# Altium PCB Breakout_Boards_Panel.PcbDoc
Units mm, origin at the board's own origin, x right, y up, seen from the top; angles counter-clockwise.
Board outline 241.45 x 205.99 mm, 4 copper layers (Top, Ground Plane, Power Plane, Bottom), stack 1.562 mm thick; 32 components, 0 nets, 0 pads, 0 vias.
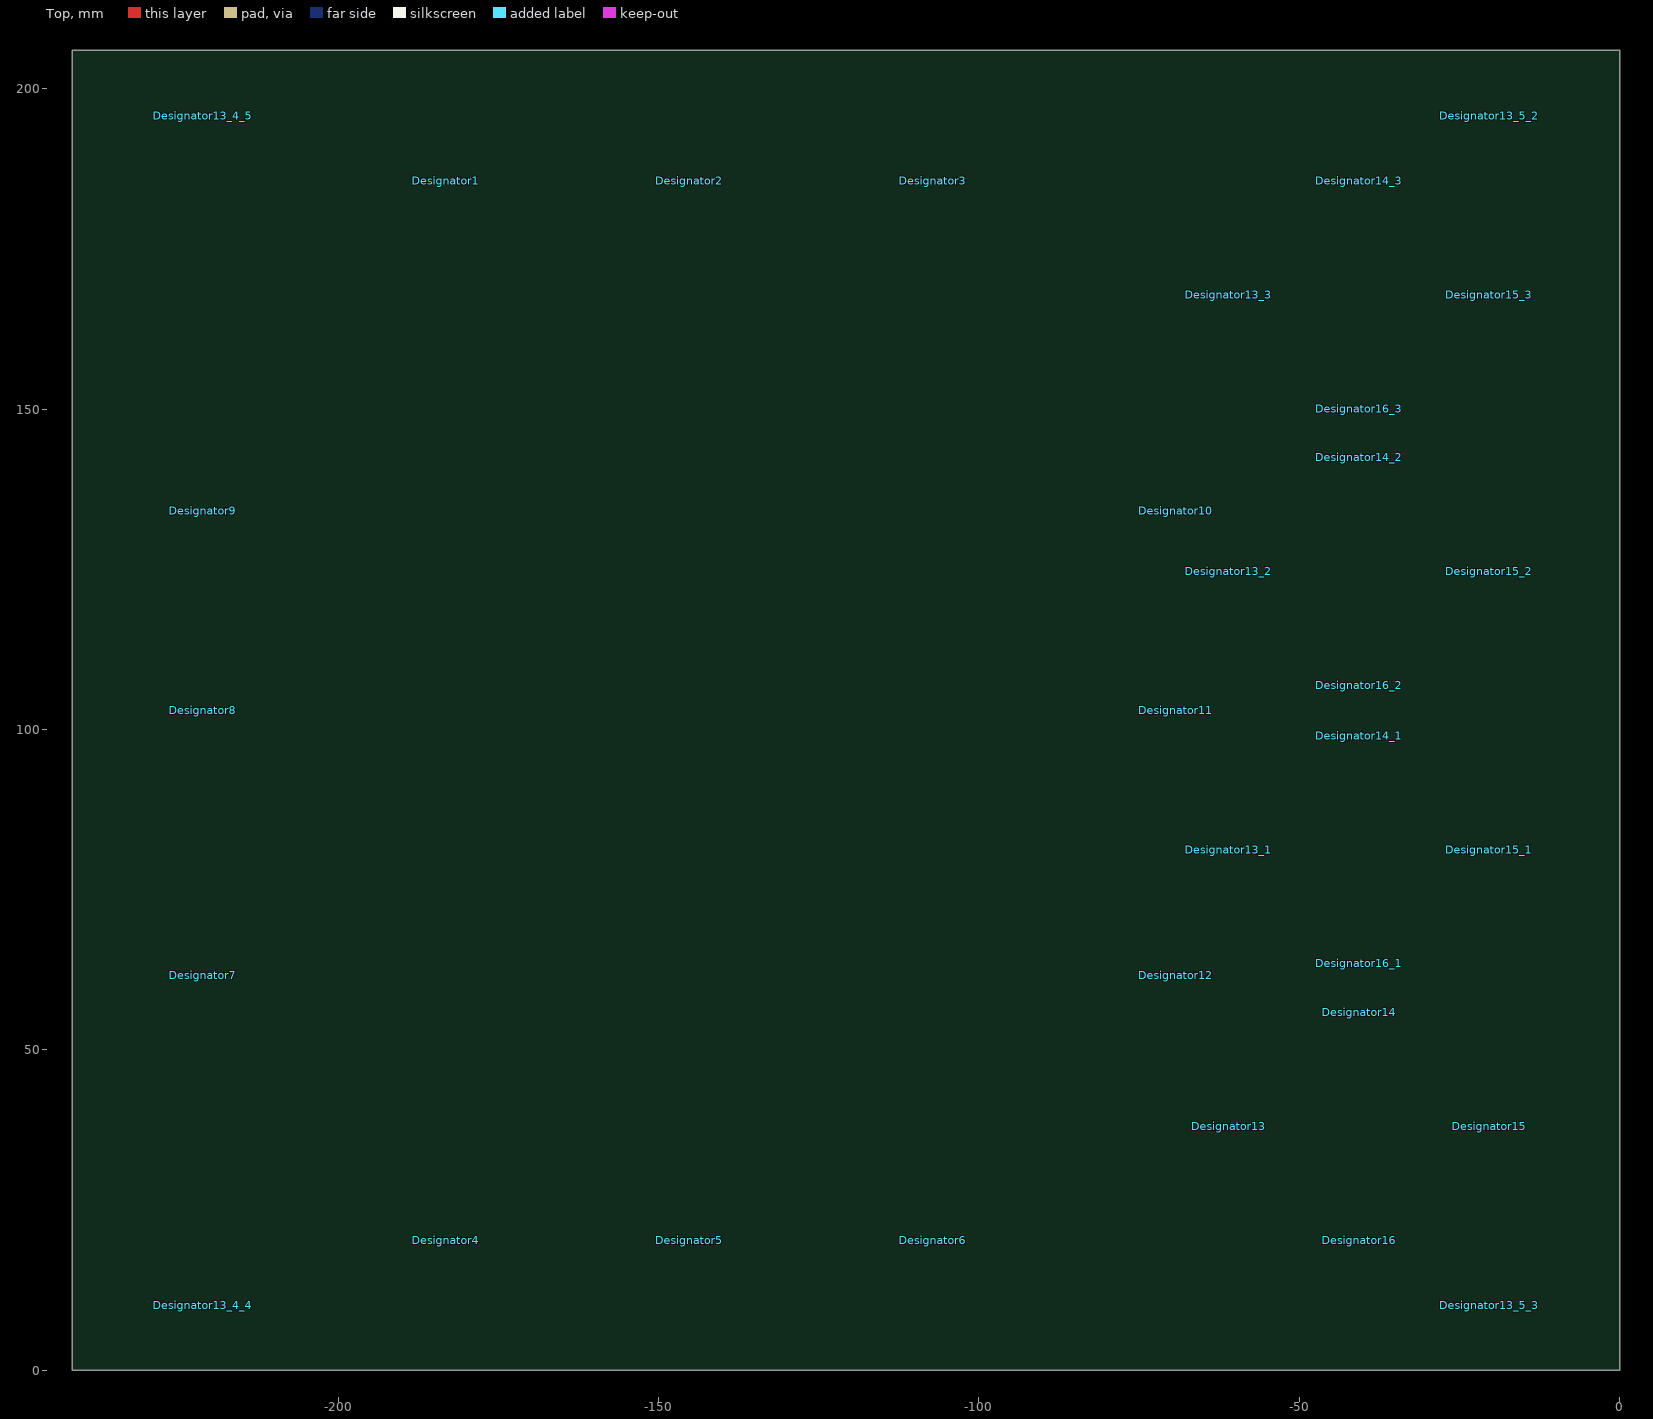
[diagram p0: Top view]
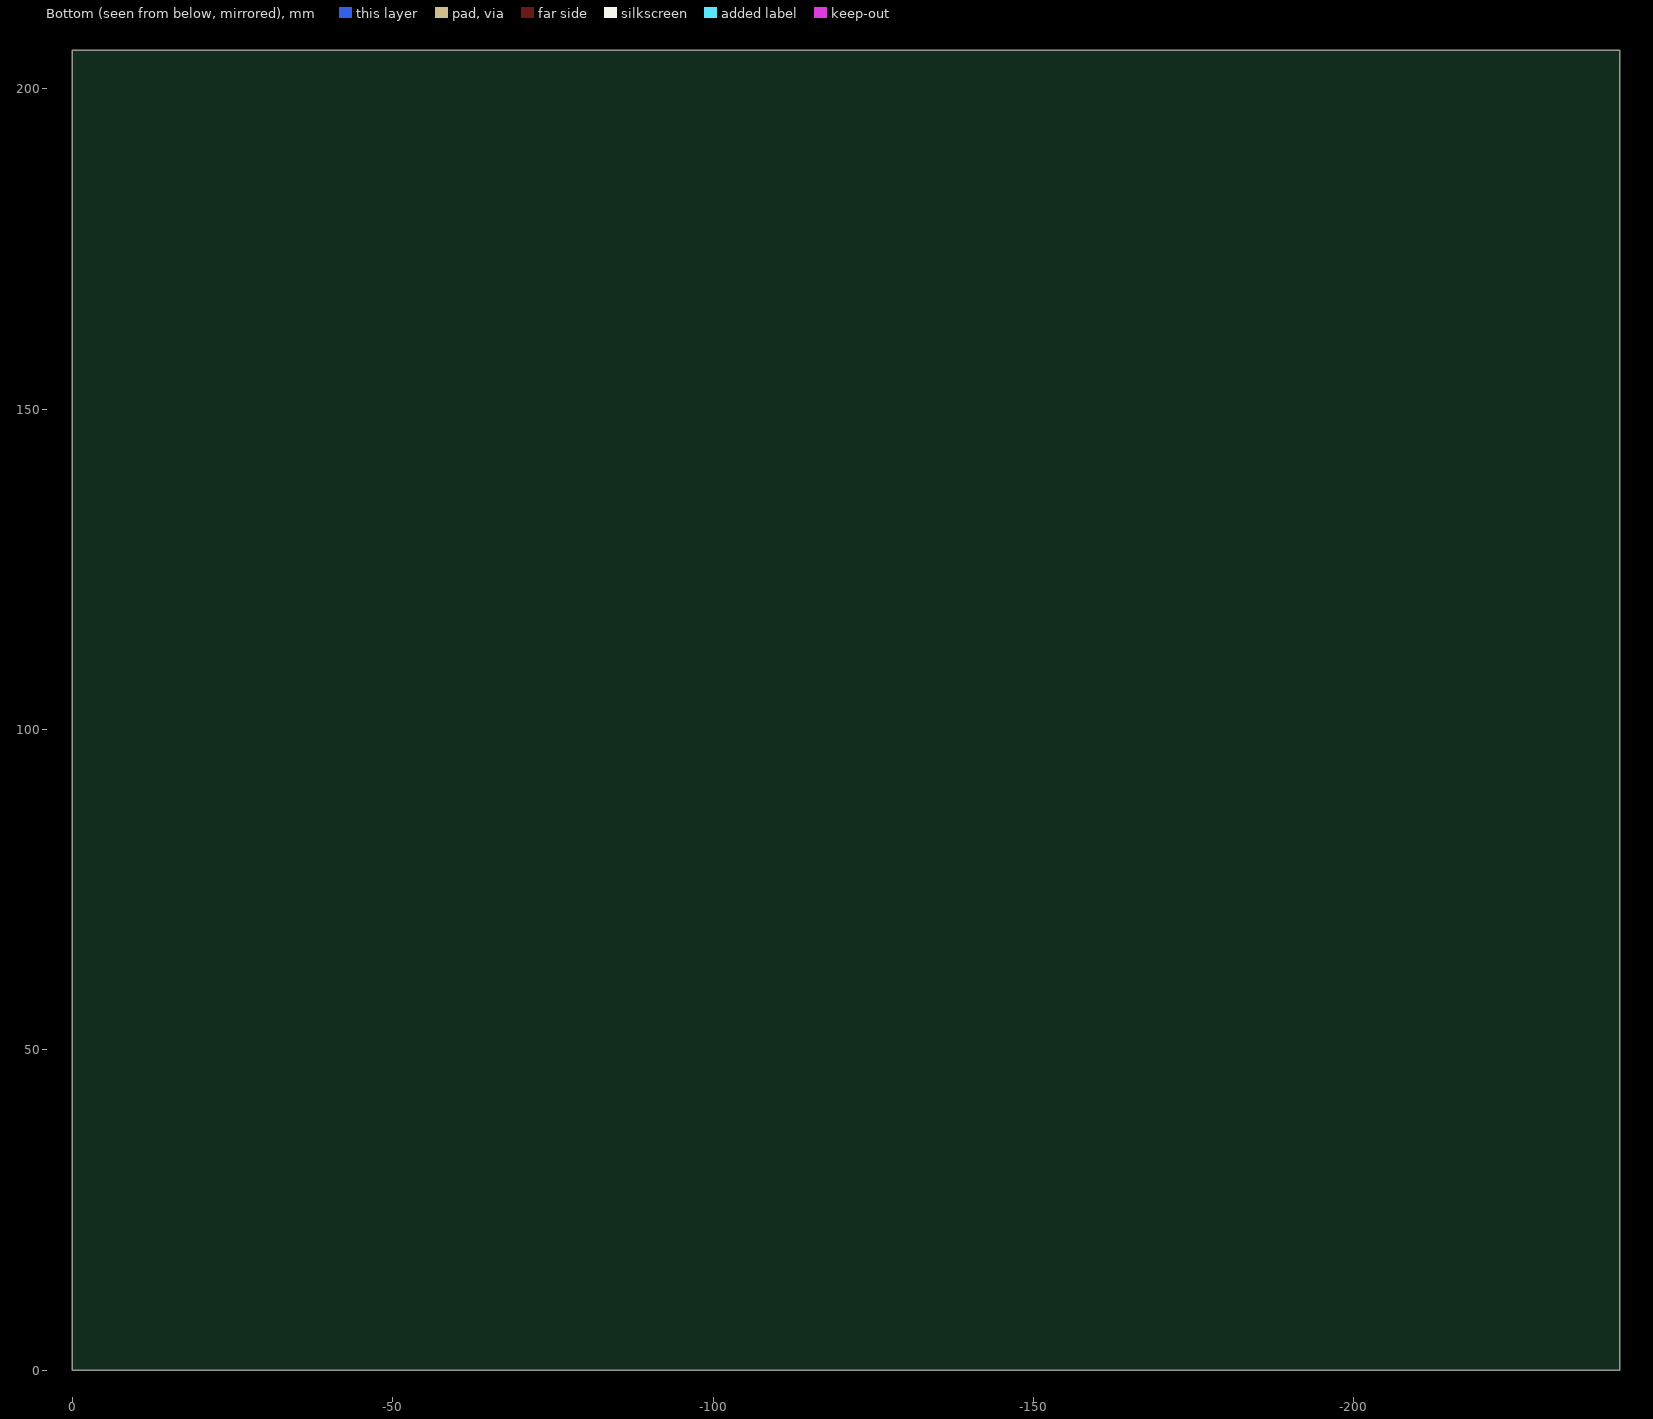
[diagram p1: Bottom view, seen from below]
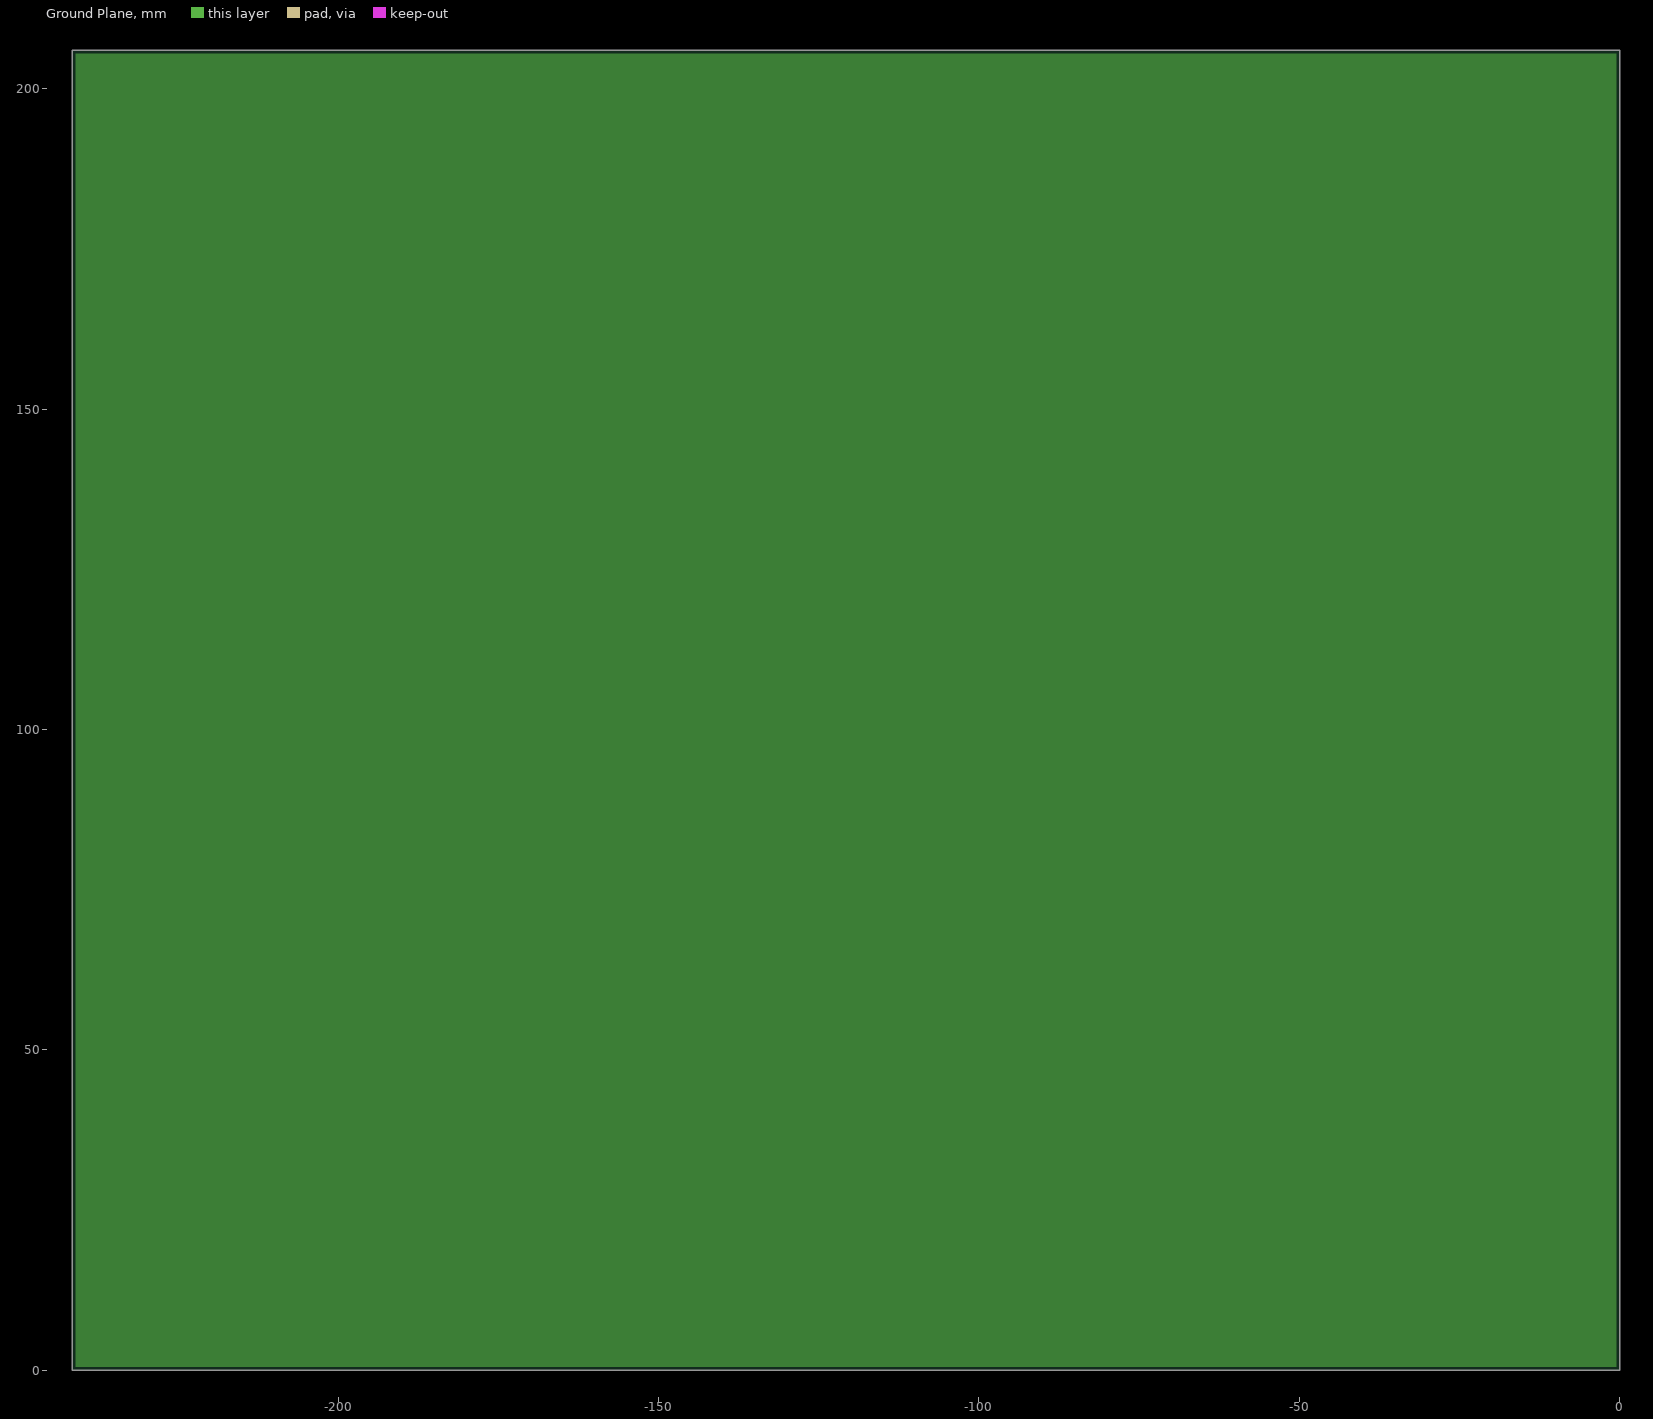
[diagram p2: Ground Plane, clearances drawn from the general rule]
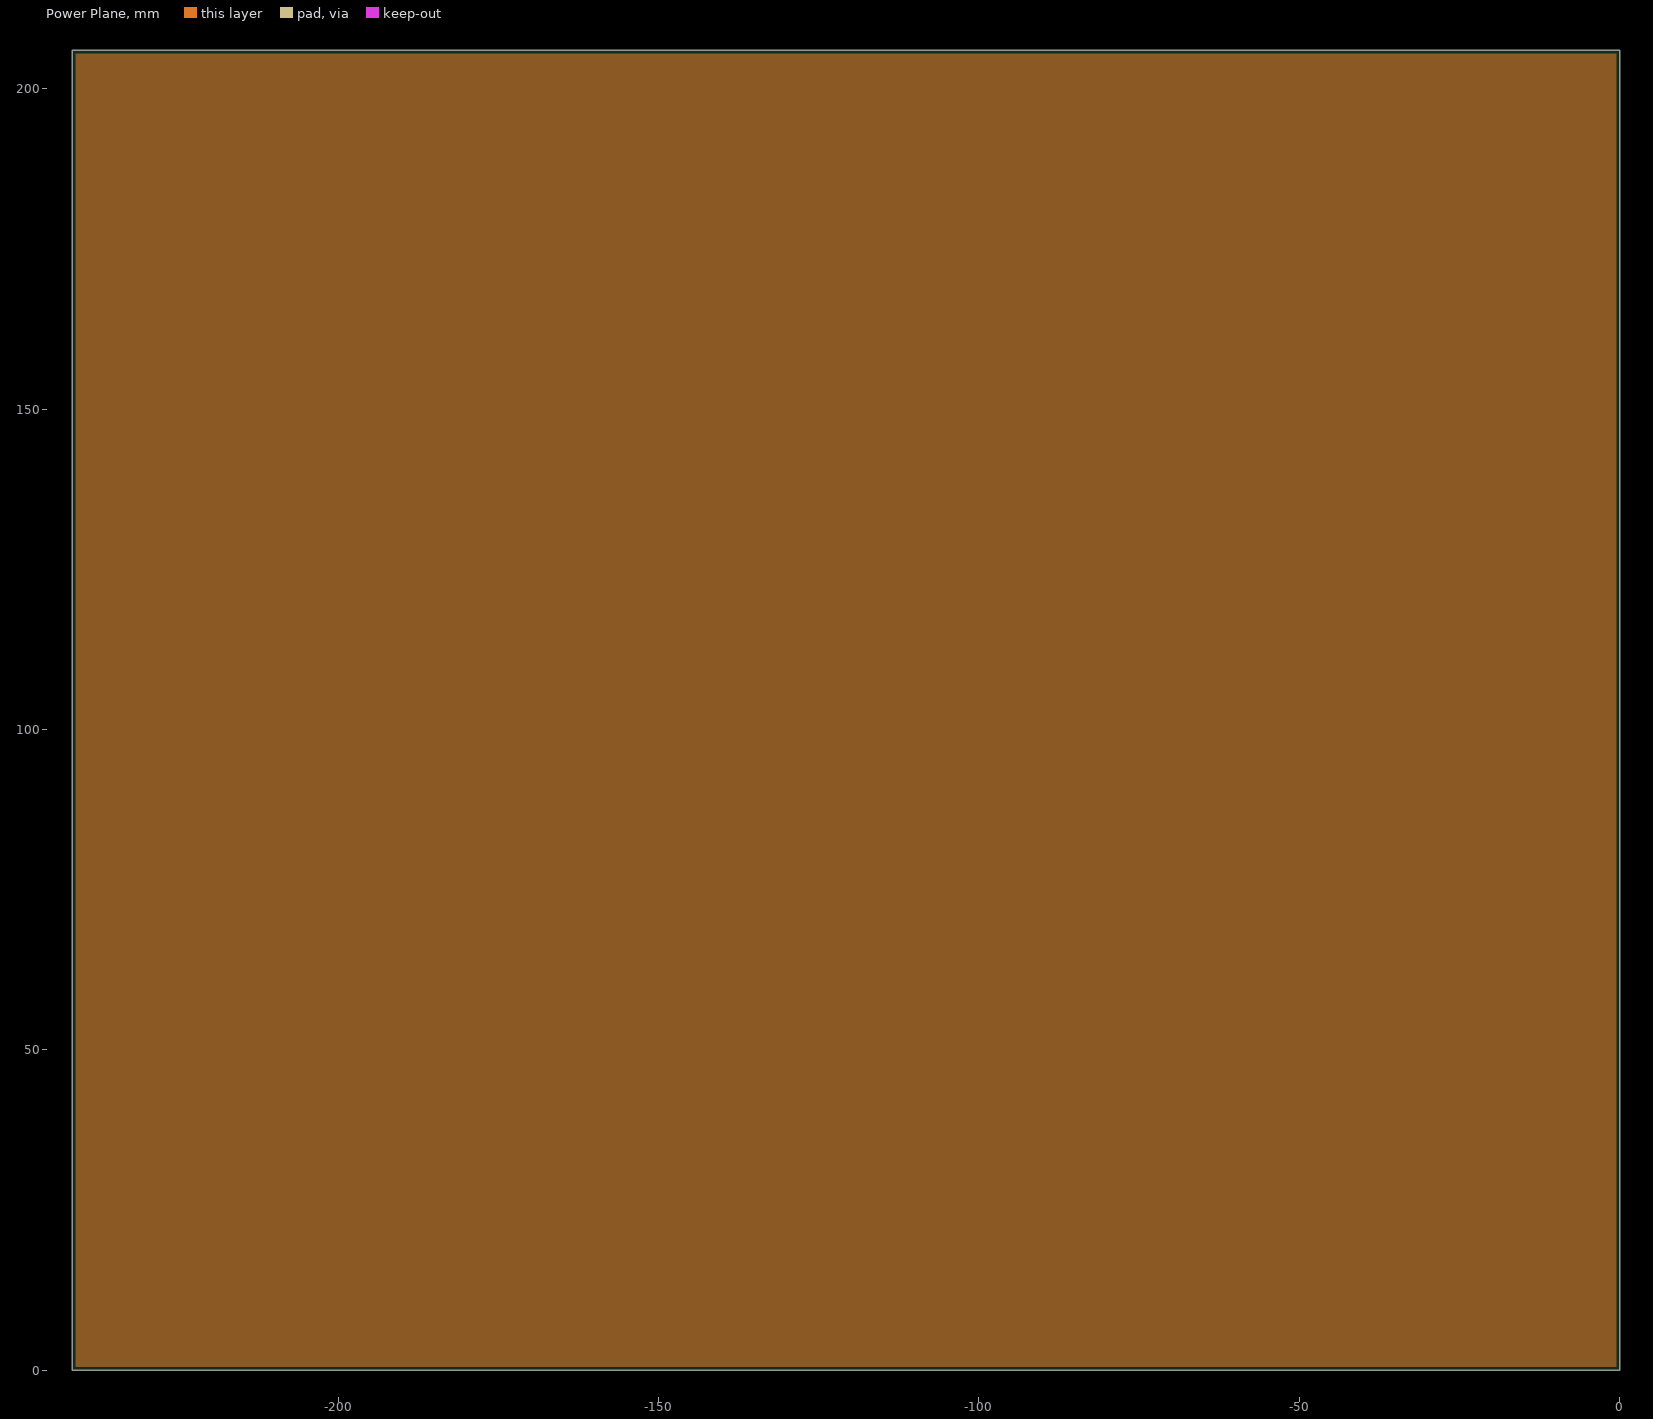
[diagram p3: Power Plane, clearances drawn from the general rule]

## Layer stack, top to bottom
Top Solder: solder mask 0.01, Solder Resist, Dk 3.5
Top: signal copper 0.035
Dielectric 1: prepreg 0.196, FR-4, Dk 4.74
Ground Plane: plane copper 0.035
Dielectric 3: core 1.03, Dk 4.6
Power Plane: plane copper 0.035
Dielectric 4: prepreg 0.196, Dk 4.74
Bottom: signal copper 0.035
Bottom Solder: solder mask 0.01, Solder Resist, Dk 3.5

## Board outline
-241.452,0 -241.452,205.994 0,205.994 0,0

## Design rules (kind name [scope] priority, off if disabled: settings)
Clearance [All] p1: gap=0.152 ignorepadtopadclearanceinfootprint=FALSE except(0: Arc-Hole Track-Hole SMDPad-Hole THPad-Hole Via-Hole Fill-Hole Poly-Hole Region-Hole Text-Hole)
ComponentClearance [All] p1: gap=0.102 collisioncheckmode=3 verticalgap=0.102 showdistances=FALSE
HoleSize [All] p1: absolutevalues=TRUE maxlimit=25.4 minlimit=0.102 maxpercent=80.000 minpercent=20.000
HoleToHoleClearance [All] p1: gap=0.254 allowstackedmicrovias=FALSE
MinimumSolderMaskSliver [All] p1: minsoldermaskwidth=0.102
PlaneClearance [All] p1: clearance=0.152
PlaneConnect [All] p1: pad.planeconnectstyle=Relief pad.reliefexpansion=0.508 pad.reliefentries=4 pad.reliefconductorwidth=0.254 pad.reliefairgap=0.254 via.planeconnectstyle=Direct via.reliefexpansion=0.508 via.reliefentries=4 via.reliefconductorwidth=0.254 via.reliefairgap=0.254
PolygonConnect [All] p1: thpad.connectstyle=Relief thpad.reliefconductorwidth=0.254 thpad.reliefentries=4 thpad.polygonreliefangle="90 Angle" thpad.airgapwidth=0.254 smdpad.connectstyle=Direct smdpad.reliefconductorwidth=0.254 smdpad.reliefentries=4 smdpad.polygonreliefangle="90 Angle" smdpad.airgapwidth=0.254 via.connectstyle=Direct via.reliefconductorwidth=0.254 via.reliefentries=4 via.polygonreliefangle="90 Angle" via.airgapwidth=0.254
RoutingVias [All] p1: holewidth=0.254 width=0.508 viastyle="Through Hole" minholewidth=0.254 minwidth=0.508 maxholewidth=0.254 maxwidth=0.508
SilkToSilkClearance [All] p1: silktosilkclearance=0.102
SilkToSolderMaskClearance [IsPad] p1: minsilkscreentomaskgap=0.051 clearancetoexposedcopper=FALSE
SolderMaskExpansion [All] p1: expansion=0.051 istentingtop=FALSE
Width [All] p1: maxlimit=25.4 minlimit=0.102 preferedwidth=0.152
22 further rules are at their usual default settings.

## Components (designator, comment, footprint, x,y, rotation, side; value= is the part's Value field where it differs from the comment)
Designator1 "Comment" MSBITE_1.6mm -183.159,185.674 r0 top
Designator2 "Comment" MSBITE_1.6mm -145.186,185.674 r0 top
Designator3 "Comment" MSBITE_1.6mm -107.213,185.674 r0 top
Designator4 "Comment" MSBITE_1.6mm -183.159,20.32 r180 top
Designator5 "Comment" MSBITE_1.6mm -145.186,20.32 r180 top
Designator6 "Comment" MSBITE_1.6mm -107.213,20.32 r180 top
Designator7 "Comment" MSBITE_1.6mm -221.132,61.658 r90 top
Designator8 "Comment" MSBITE_1.6mm -221.132,102.997 r90 top
Designator9 "Comment" MSBITE_1.6mm -221.132,134.175 r90 top
Designator10 "Comment" MSBITE_1.6mm -69.24,134.175 r270 top
Designator11 "Comment" MSBITE_1.6mm -69.24,102.997 r270 top
Designator12 "Comment" MSBITE_1.6mm -69.24,61.658 r270 top
Designator13 "Comment" MSBITE_1.6mm -60.96,38.1 r90 top
Designator13_1 "Comment" MSBITE_1.6mm -60.96,81.28 r90 top
Designator13_2 "Comment" MSBITE_1.6mm -60.96,124.714 r90 top
Designator13_3 "Comment" MSBITE_1.6mm -60.96,167.894 r90 top
Designator13_4_4 "Comment" MSBITE_1.6mm -221.132,10.16 r90 top
Designator13_4_5 "Comment" MSBITE_1.6mm -221.132,195.834 r90 top
Designator13_5_2 "Comment" MSBITE_1.6mm -20.32,195.834 r270 top
Designator13_5_3 "Comment" MSBITE_1.6mm -20.32,10.16 r270 top
Designator14 "Comment" MSBITE_1.6mm -40.64,55.88 r0 top
Designator14_1 "Comment" MSBITE_1.6mm -40.64,99.06 r0 top
Designator14_2 "Comment" MSBITE_1.6mm -40.64,142.494 r0 top
Designator14_3 "Comment" MSBITE_1.6mm -40.64,185.674 r0 top
Designator15 "Comment" MSBITE_1.6mm -20.32,38.1 r270 top
Designator15_1 "Comment" MSBITE_1.6mm -20.32,81.28 r270 top
Designator15_2 "Comment" MSBITE_1.6mm -20.32,124.714 r270 top
Designator15_3 "Comment" MSBITE_1.6mm -20.32,167.894 r270 top
Designator16 "Comment" MSBITE_1.6mm -40.64,20.32 r180 top
Designator16_1 "Comment" MSBITE_1.6mm -40.64,63.5 r180 top
Designator16_2 "Comment" MSBITE_1.6mm -40.64,106.934 r180 top
Designator16_3 "Comment" MSBITE_1.6mm -40.64,150.114 r180 top

## Footprints (in the part's own frame and the unit in brackets; to place one, negate y for a bottom-side part, rotate by r counter-clockwise, add the part's x,y. Pads: shape width x height; smd on the part's side, far side on the other; paste and mask are expansions set on the pad)
MSBITE_1.6mm [mm] "Mousebite - 1.6 mm spacing"

## Nets (pads, with @x,y where several pads share a name; then routed paths per layer and width w, separated by ;. In a path a pad name is that pad's centre, name@x,y a point inside that pad or via, vN(x,y) a via of type N, cw(c..) or ccw(c..) an arc to the next point about the centre after c; other vN are vias at no path point)

## Polygon pours and split planes (outlines as drawn)
no net on Ground Plane (split plane): -0.51,0.51 -240.942,0.51 -240.942,205.484 -0.51,205.484
no net on Power Plane (split plane): -0.51,0.51 -240.942,0.51 -240.942,205.484 -0.51,205.484

## Silkscreen, mask and mechanical layers (free items; w line width, h text height)
Panel Outline:
  the board outline again, w0.254
Route Tool Path:
  circle w1.2: c-10.16,195.834 r0.6
  circle w1.2: c-10.16,10.16 r0.6
  circle w1.2: c-231.292,10.16 r0.6
  circle w1.2: c-231.292,195.834 r0.6
  lines w1.6: -221.932,0.305 -221.932,7.06 ; -221.932,14.76 -221.932,21.02 ; -221.932,57.058 -221.932,19.52 -187.759,19.52 ; -221.932,66.258 -221.932,98.397 ; -221.932,107.597 -221.932,129.575 ; -221.932,138.775 -221.932,186.474 -187.759,186.474 ; -221.932,184.974 -221.932,191.234 ; -221.932,198.934 -221.932,205.689 ; -178.559,19.52 -149.786,19.52 ; -178.559,186.474 -149.786,186.474 ; -140.586,19.52 -111.813,19.52 ; -140.586,186.474 -111.813,186.474 ; -102.613,19.52 -68.44,19.52 ; -102.613,186.474 -68.44,186.474 ; -68.44,57.059 -68.44,19.52 ; -68.44,66.259 -68.44,98.397 ; -68.44,107.597 -68.44,129.576 ; -68.44,138.776 -68.44,186.474 ; -61.76,33.5 -61.76,19.52 ; -61.76,42.7 -61.76,56.68 -45.24,56.68 ; -61.76,56.13 -61.76,62.7 ; -61.76,76.68 -61.76,62.7 ; -61.76,85.88 -61.76,99.86 -45.24,99.86 ; -61.76,99.564 -61.76,106.134 ; -61.76,120.114 -61.76,106.134 ; -61.76,129.314 -61.76,143.294 -45.24,143.294 ; -61.76,142.744 -61.76,149.314 ; -61.76,163.294 -61.76,149.314 ; -61.76,172.494 -61.76,186.474 ; -45.24,19.52 -61.76,19.52 ; -45.24,62.7 -61.76,62.7 ; -45.24,106.134 -61.76,106.134 ; -45.24,149.314 -61.76,149.314 ; -45.24,186.474 -61.76,186.474 ; -36.04,19.52 -19.52,19.52 ; -36.04,56.68 -19.52,56.68 -19.52,42.7 ; -36.04,62.7 -19.52,62.7 ; -36.04,99.86 -19.52,99.86 -19.52,85.88 ; -36.04,106.134 -19.52,106.134 ; -36.04,143.294 -19.52,143.294 -19.52,129.314 ; -36.04,149.314 -19.52,149.314 ; -36.04,186.474 -19.52,186.474 -19.52,172.494 ; -19.52,0.305 -19.52,7.06 ; -19.52,13.26 -19.52,19.52 ; -19.52,33.5 -19.52,19.52 ; -19.52,56.13 -19.52,62.7 ; -19.52,76.68 -19.52,62.7 ; -19.52,99.564 -19.52,106.134 ; -19.52,120.114 -19.52,106.134 ; -19.52,142.744 -19.52,149.314 ; -19.52,163.294 -19.52,149.314 ; -19.52,184.974 -19.52,191.234 ; -19.52,198.934 -19.52,205.689 ; -68.44,19.52 -61.76,19.52 ; -68.44,186.474 -61.76,186.474
Manufacturing Notes:
  lines w0.254: 21.778,133.45 81.5,133.45 ; 80,171.55 81.5,171.55 ; 81.468,129.64 81.468,171.55 81.468,175.36 ; 81.5,129.64 21.778,129.64 21.778,171.55 ; 81.5,137.26 21.778,137.26 21.778,141.07 81.5,141.07 ; 81.5,144.88 21.778,144.88 21.778,148.69 81.5,148.69 ; 81.5,152.5 21.778,152.5 21.778,156.31 81.5,156.31 ; 81.5,160.12 21.778,160.12 21.778,163.93 81.5,163.93 ; 81.5,167.74 21.778,167.74 21.778,171.55 ; 81.5,175.36 21.778,175.36 21.778,171.55 ; 21.778,171.55 81.5,171.55 ; 21.778,171.55 35.748,171.55 ; 35.748,171.55 35.748,129.64 48.448,129.64 48.448,171.55 ; 35.748,171.55 35.748,175.36 48.448,175.36 48.448,171.55 ; 48.448,171.55 58.608,171.55 ; 48.448,171.55 58.608,171.55 ; 58.608,171.55 58.608,129.64 72.578,129.64 72.578,171.55 ; 58.608,171.55 58.608,175.36 72.578,175.36 72.578,171.55 ; 72.578,171.55 81.5,171.55 ; 72.578,171.55 81.5,171.55
  text "Type" at 25.842,173.107 h1.52
  text "Material" at 39.304,173.107 h1.52
  text "Weight" at 51.496,173.107 h1.52
  text "Dk" at 76.388,173.107 h1.52
  text "Thickness" at 62.164,173.074 h1.52
  text "Top Overlay" at 23.472,169.01 h1.52
  text "0.01 mm" at 62.179,165.277 h1.52
  text "3.5" at 75.794,165.227 h1.52
  text "Top Solder" at 23.472,165.185 h1.52
  text "0.0175 mm" at 61.747,162.509 h1.52
  text "0.5 oz" at 51.791,161.823 h1.52
  text "Top Layer" at 23.472,161.39 h1.52
  text "(Plating to 1 oz)" at 60.808,160.706 h1.52
  text "0.196 mm" at 62.484,157.759 h1.52
  text "4.74" at 75.743,157.742 h1.52
  text "7628 RC 46%" at 38.76,157.709 h1.52
  text "Dielectric 1" at 23.472,157.309 h1.52
  text "Second Layer" at 23.749,153.99 h1.52
  text "1 oz" at 51.638,153.822 h1.52
  text "0.035 mm" at 61.9,153.695 h1.52
  text "Core" at 23.927,150.216 h1.52
  text "1.03 mm" at 62.103,150.038 h1.52
  text "4.6" at 75.921,149.961 h1.52
  text "Core" at 39.141,149.616 h1.52
  text "1 oz" at 51.587,146.228 h1.52
  text "0.035 mm" at 62.332,146.177 h1.52
  text "Third Layer" at 23.472,146.15 h1.52
  text "7628 RC 46%" at 37.617,142.545 h1.52
  text "4.74" at 75.124,142.438 h1.52
  text "0.196 mm" at 61.951,142.367 h1.52
  text "Dielectric 2" at 23.472,142.069 h1.52
  text "0.0175 mm" at 61.146,139.577 h1.52
  text "0.5 oz" at 51.994,138.634 h1.52
  text "Fourth Layer" at 23.472,138.53 h1.52
  text "(Plating to 1 oz)" at 60.206,137.774 h1.52
  text "3.5" at 75.87,135.026 h1.52
  text "Bottom Solder" at 23.472,134.737 h1.52
  text "0.01 mm" at 62.306,134.594 h1.52
  text "Bottom Overlay" at 23.472,131.196 h1.52

## Panel: embedded boards
"..\..\..\..\Electrode Breakout\01 - SCHEMAS ET PCB\99 - WORKING COPY\Electrode_Breakout\Electrode_Breakout.PcbDoc" at -60.96,20.32, 1 rows x 1 columns, spacing 63.5 x 38.1, rotation 0
"..\..\..\..\Electrode Breakout\01 - SCHEMAS ET PCB\99 - WORKING COPY\Electrode_Breakout\Electrode_Breakout.PcbDoc" at -60.96,63.5, 1 rows x 1 columns, spacing 63.5 x 38.1, rotation 0
"..\..\..\..\Electrode Breakout\01 - SCHEMAS ET PCB\99 - WORKING COPY\Electrode_Breakout\Electrode_Breakout.PcbDoc" at -60.96,106.934, 1 rows x 1 columns, spacing 63.5 x 38.1, rotation 0
"..\..\..\..\XEM7310_Breakout\01 - SCHEMAS ET PCB\99 - WORKING COPY\XEM7310_Berakout\XEM7310_Breakout.PcbDoc" at -221.132,20.32, 1 rows x 1 columns, spacing 63.5 x 38.1, rotation 0
"..\..\..\..\Electrode Breakout\01 - SCHEMAS ET PCB\99 - WORKING COPY\Electrode_Breakout\Electrode_Breakout.PcbDoc" at -60.96,150.114, 1 rows x 1 columns, spacing 63.5 x 38.1, rotation 0